# EAGLE board TinyNES_Enclosure_Bottom (EAGLE 9.6.2)
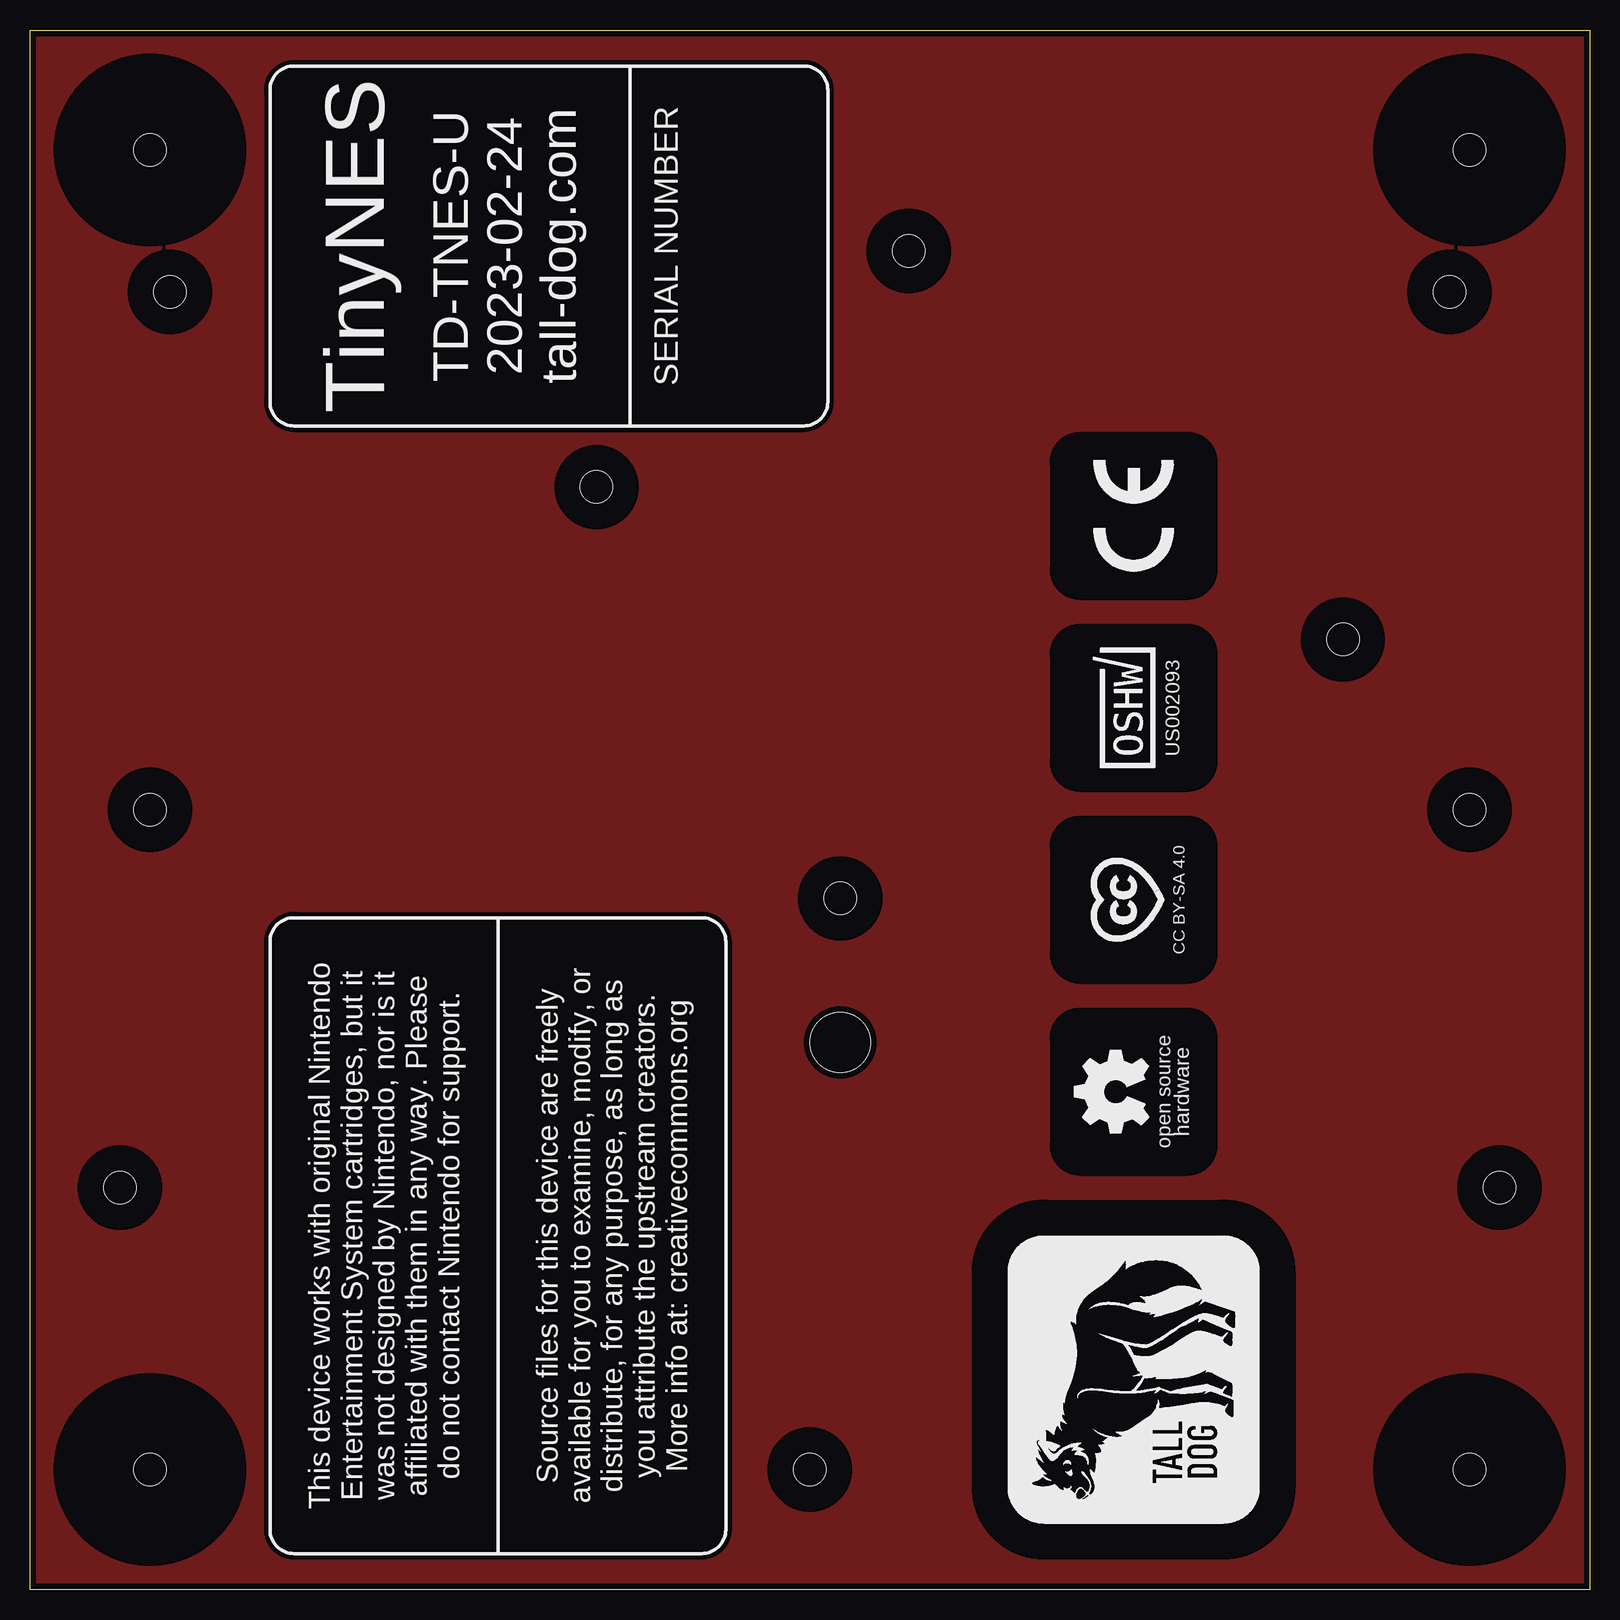
[diagram p0: board, top side]
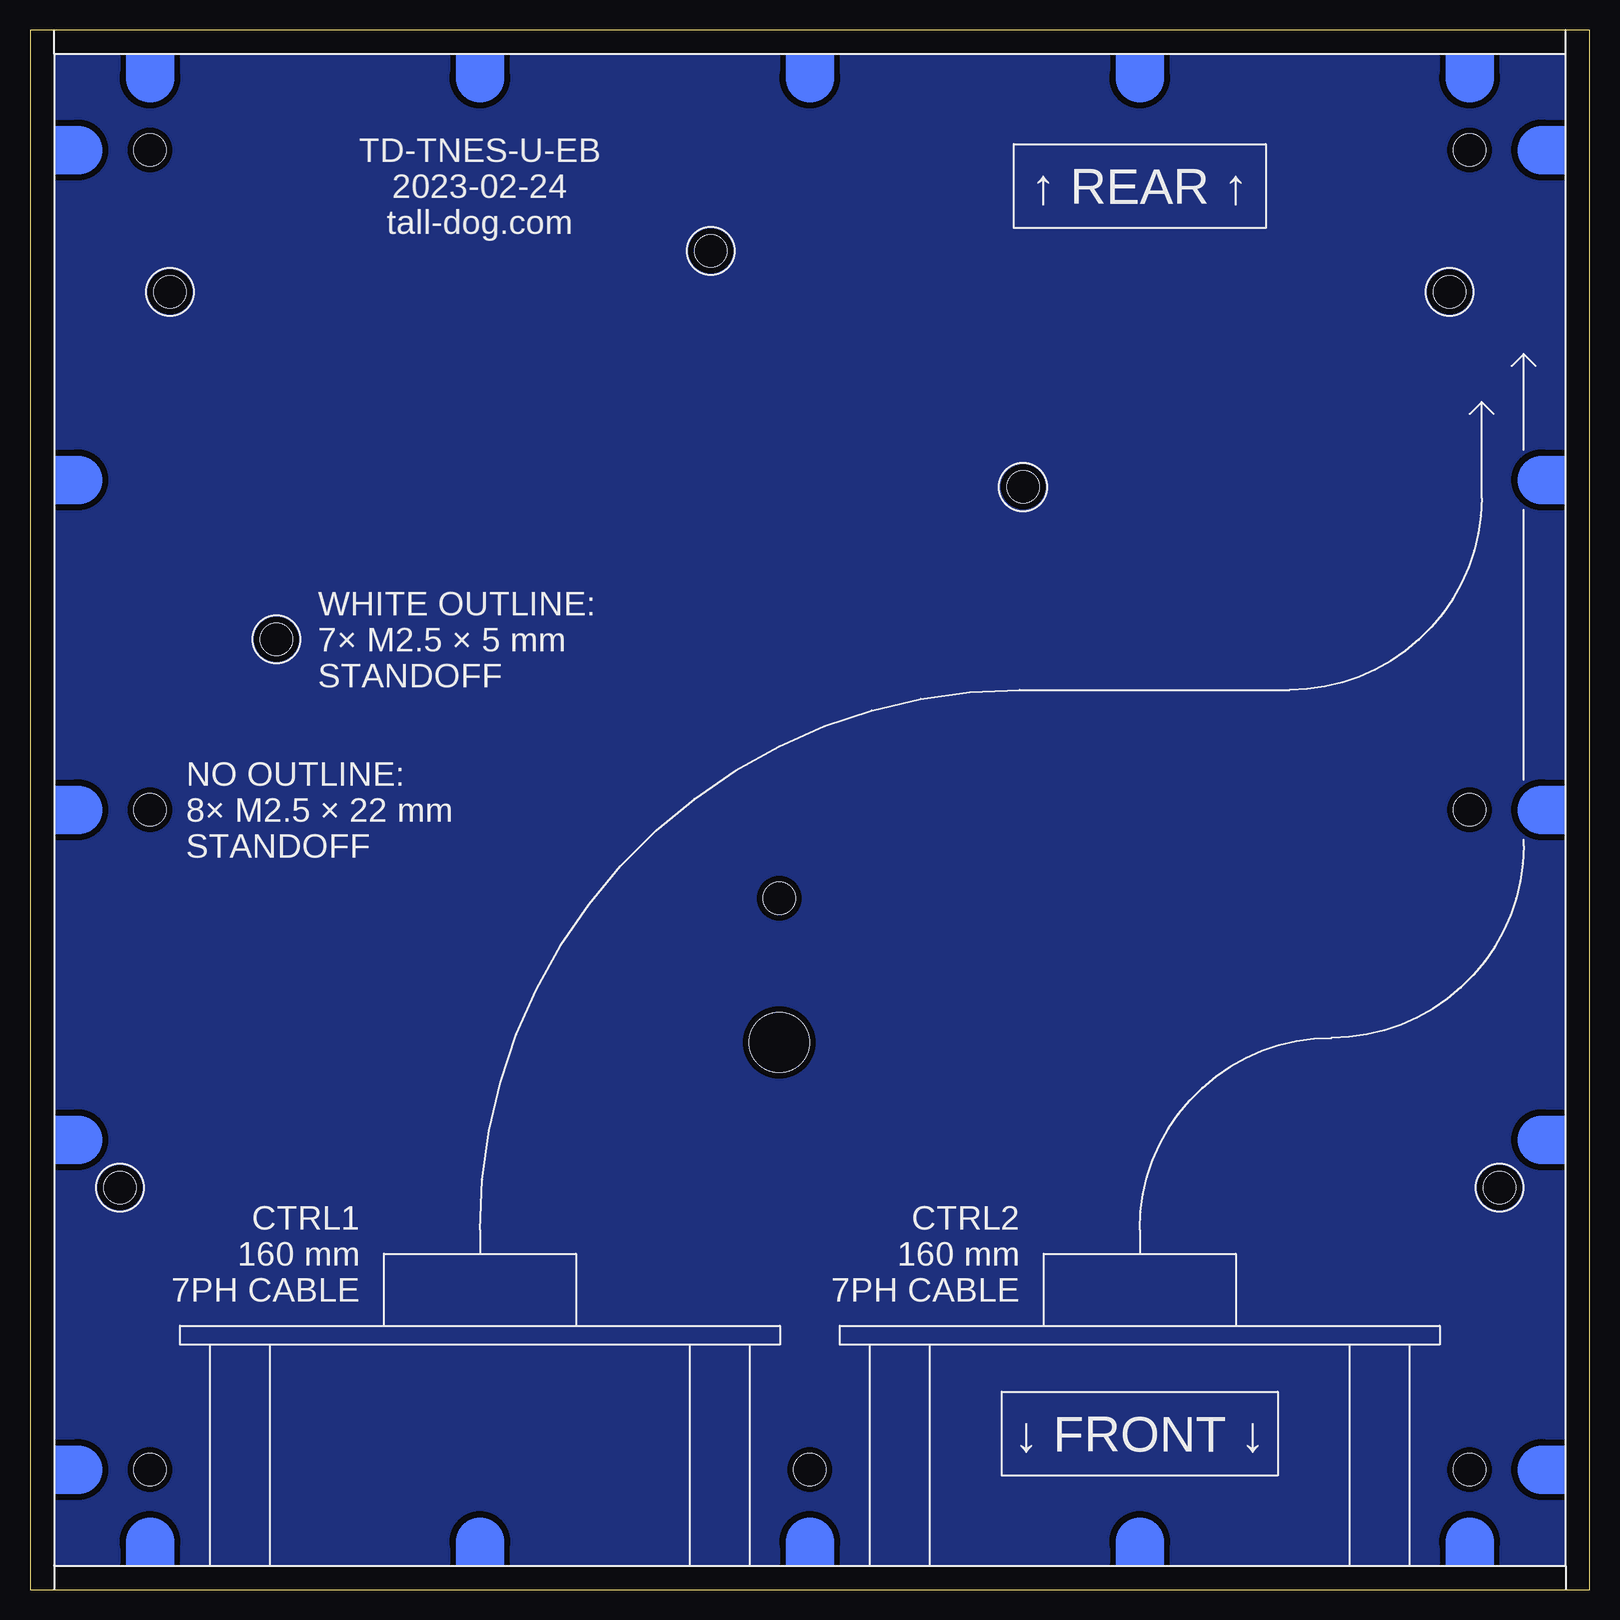
[diagram p1: board, bottom side, seen from below]

Size 130 x 130 mm. Coordinates in mm from the lower left corner, seen from the top.
Outline: 130,130 130,0 0,0 0,130 130,130
Copper layers (1*16): Top 0.035mm / dielectric 1.5mm / Bottom 0.035mm
Design rules "default *": minimum track width 6mil, minimum drill 0.35mm, track to track 6mil, track to pad 6mil, pad to pad 6mil, via to via 6mil, smd to smd 6mil, copper to edge 20mil, drill to drill 6mil, minimum pad ring 10mil, minimum via ring 8mil, stop-mask expansion 0mil, vias tented up to drill 0mil, thermal gap 10mil
Holes 5 mm at 67.54,45.61
tRestrict: area 22,99 to 64.5,125; area 22,5 to 56,54; area 84.5,8.5 to 99.5,26.5; area 87.5,37 to 96.5,46; area 87.5,53 to 96.5,62; area 87.5,69 to 96.5,78; area 87.5,85 to 96.5,94

## Footprints (pad centres in the part's own frame; a part is rotated, then mirrored left to right if it is on the bottom)
_COUNTERSINK-M2.5-TOP = hole 2.7: 0,0
_COUNTERBORE-FOOT-TOP = hole 2.7: 0,0

## Placement (x,y rotation side)
E$1  [_LOGO-CC-BY-SA]  91.5,57.5 90 top
E$2  [_LOGO-OSH]  90.5,41.5 90 top
E$3  [_LOGO-OSHW]  91.5,73.5 90 top
E$4  [_LOGO-CE]  92,89.5 90 top
E$41  [_ENCLOSURE-SOLDER-POINT]  10,2 180 bottom
E$42  [_ENCLOSURE-SOLDER-POINT]  65,2 180 bottom
E$43  [_ENCLOSURE-SOLDER-POINT]  120,2 180 bottom
E$44  [_ENCLOSURE-SOLDER-POINT]  2,10 270 bottom
E$45  [_ENCLOSURE-SOLDER-POINT]  2,65 270 bottom
E$46  [_ENCLOSURE-SOLDER-POINT]  2,120 270 bottom
E$47  [_ENCLOSURE-SOLDER-POINT]  10,128 0 bottom
E$48  [_ENCLOSURE-SOLDER-POINT]  120,128 0 bottom
E$49  [_ENCLOSURE-SOLDER-POINT]  65,128 0 bottom
E$50  [_ENCLOSURE-SOLDER-POINT]  128,120 90 bottom
E$51  [_ENCLOSURE-SOLDER-POINT]  128,92.5 90 bottom
E$52  [_ENCLOSURE-SOLDER-POINT]  128,65 90 bottom
E$53  [_ENCLOSURE-SOLDER-POINT]  37.5,2 180 bottom
E$54  [_ENCLOSURE-SOLDER-POINT]  92.5,2 180 bottom
E$55  [_ENCLOSURE-SOLDER-POINT]  2,92.5 270 bottom
E$56  [_ENCLOSURE-SOLDER-POINT]  2,37.5 270 bottom
E$57  [_ENCLOSURE-SOLDER-POINT]  128,37.5 90 bottom
E$58  [_ENCLOSURE-SOLDER-POINT]  128,10 90 bottom
E$59  [_ENCLOSURE-SOLDER-POINT]  37.5,128 0 bottom
E$60  [_ENCLOSURE-SOLDER-POINT]  92.5,128 0 bottom
E$61  [_COUNTERSINK-M2.5-TOP]  7.5,33.5 0 top
E$62  [_COUNTERSINK-M2.5-TOP]  10,65 0 top
E$63  [_COUNTERSINK-M2.5-TOP]  11.66,108.16 180 top
E$64  [_COUNTERSINK-M2.5-TOP]  47.22,91.91 0 top
E$65  [_COUNTERSINK-M2.5-TOP]  73.25,111.59 0 top
E$66  [_COUNTERSINK-M2.5-TOP]  118.34,108.16 180 top
E$67  [_COUNTERSINK-M2.5-TOP]  109.45,79.2 0 top
E$68  [_COUNTERSINK-M2.5-TOP]  120,65 0 top
E$69  [_COUNTERSINK-M2.5-TOP]  122.5,33.5 0 top
E$70  [_COUNTERSINK-M2.5-TOP]  65,10 0 top
E$71  [_COUNTERSINK-M2.5-TOP]  67.54,57.61 0 top
E$72  [_COUNTERBORE-FOOT-TOP]  120,120 0 top
E$73  [_COUNTERBORE-FOOT-TOP]  10,120 0 top
E$74  [_COUNTERBORE-FOOT-TOP]  10,10 0 top
E$75  [_COUNTERBORE-FOOT-TOP]  120,10 0 top
E$78  [_LOGO-TALL-DOG]  92,17.5 90 top

## Library data of the parts
E$1-E$4 E$41-E$75 E$78 = TinyNES_Library

## Tracks (layer width: path | path; a pad name or v marks a point on that pad's centre or on a via)
GND
  pour Top (isolate 0.508, rank 2): 0,0 130,0 130,130 0,130
  pour Bottom (isolate 0.508, rank 2): 2.25,2.25 127.75,2.25 127.75,127.75 2.25,127.75

## Text on the board
tPlace: TinyNES | TD-TNES-U / 2023-02-24 / tall-dog.com | SERIAL NUMBER | This device works with original Nintendo / Entertainment System cartridges, but it / was not designed by Nintendo, nor is it / affiliated with them in any way. Please / do not contact Nintendo for support. | Source files for this device are freely / available for you to examine, modify, or / distribute, for any purpose, as long as / you attribute the upstream creators. / More info at: creativecommons.org
bPlace: ↑ REAR ↑ | TD-TNES-U-EB / 2023-02-24 / tall-dog.com | WHITE OUTLINE: / 7× M2.5 × 5 mm / STANDOFF | NO OUTLINE: / 8× M2.5 × 22 mm / STANDOFF | CTRL2 / 160 mm / 7PH CABLE | CTRL1 / 160 mm / 7PH CABLE | ↓ FRONT ↓
tStop: EXP
Document: MILL THIS AREA / TO DEPTH OF 0.5 MM / ON TOP SIDE